# Altium PCB SolidStateTeslaCoil_PCB.PcbDoc
Units mm, origin at the board's own origin, x right, y up, seen from the top; angles counter-clockwise.
Board outline 100 x 100 mm, 4 copper layers (Top Layer, GND_1, GND_2, Bottom Layer), stack 1.57 mm thick; 89 components, 41 nets, 255 pads, 32 vias.
Unrouted connection lines stored in the file: 1.
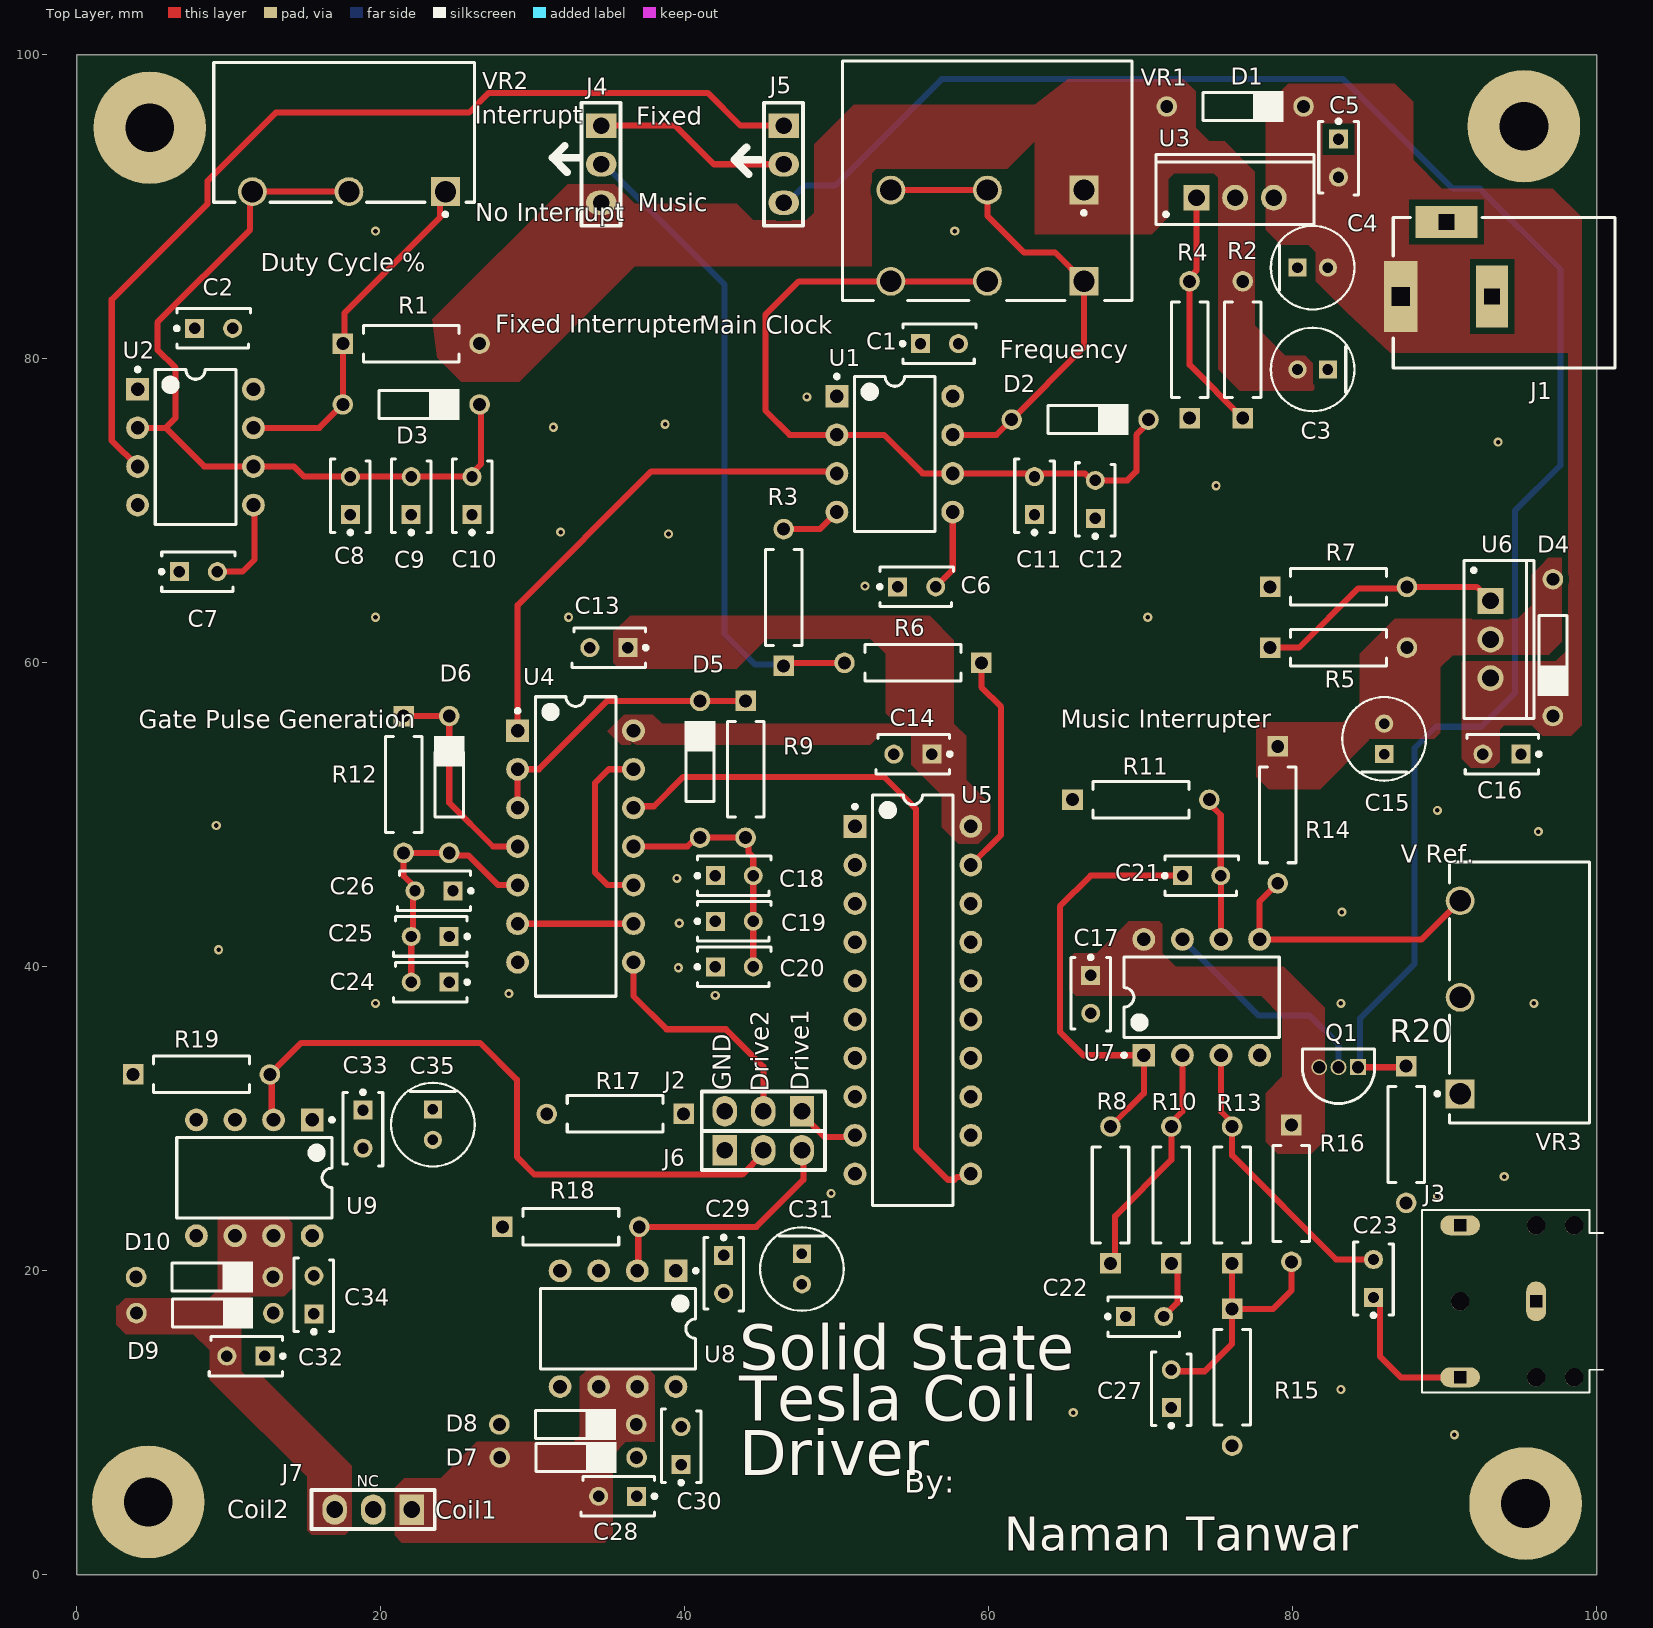
[diagram p0: Top Layer view]
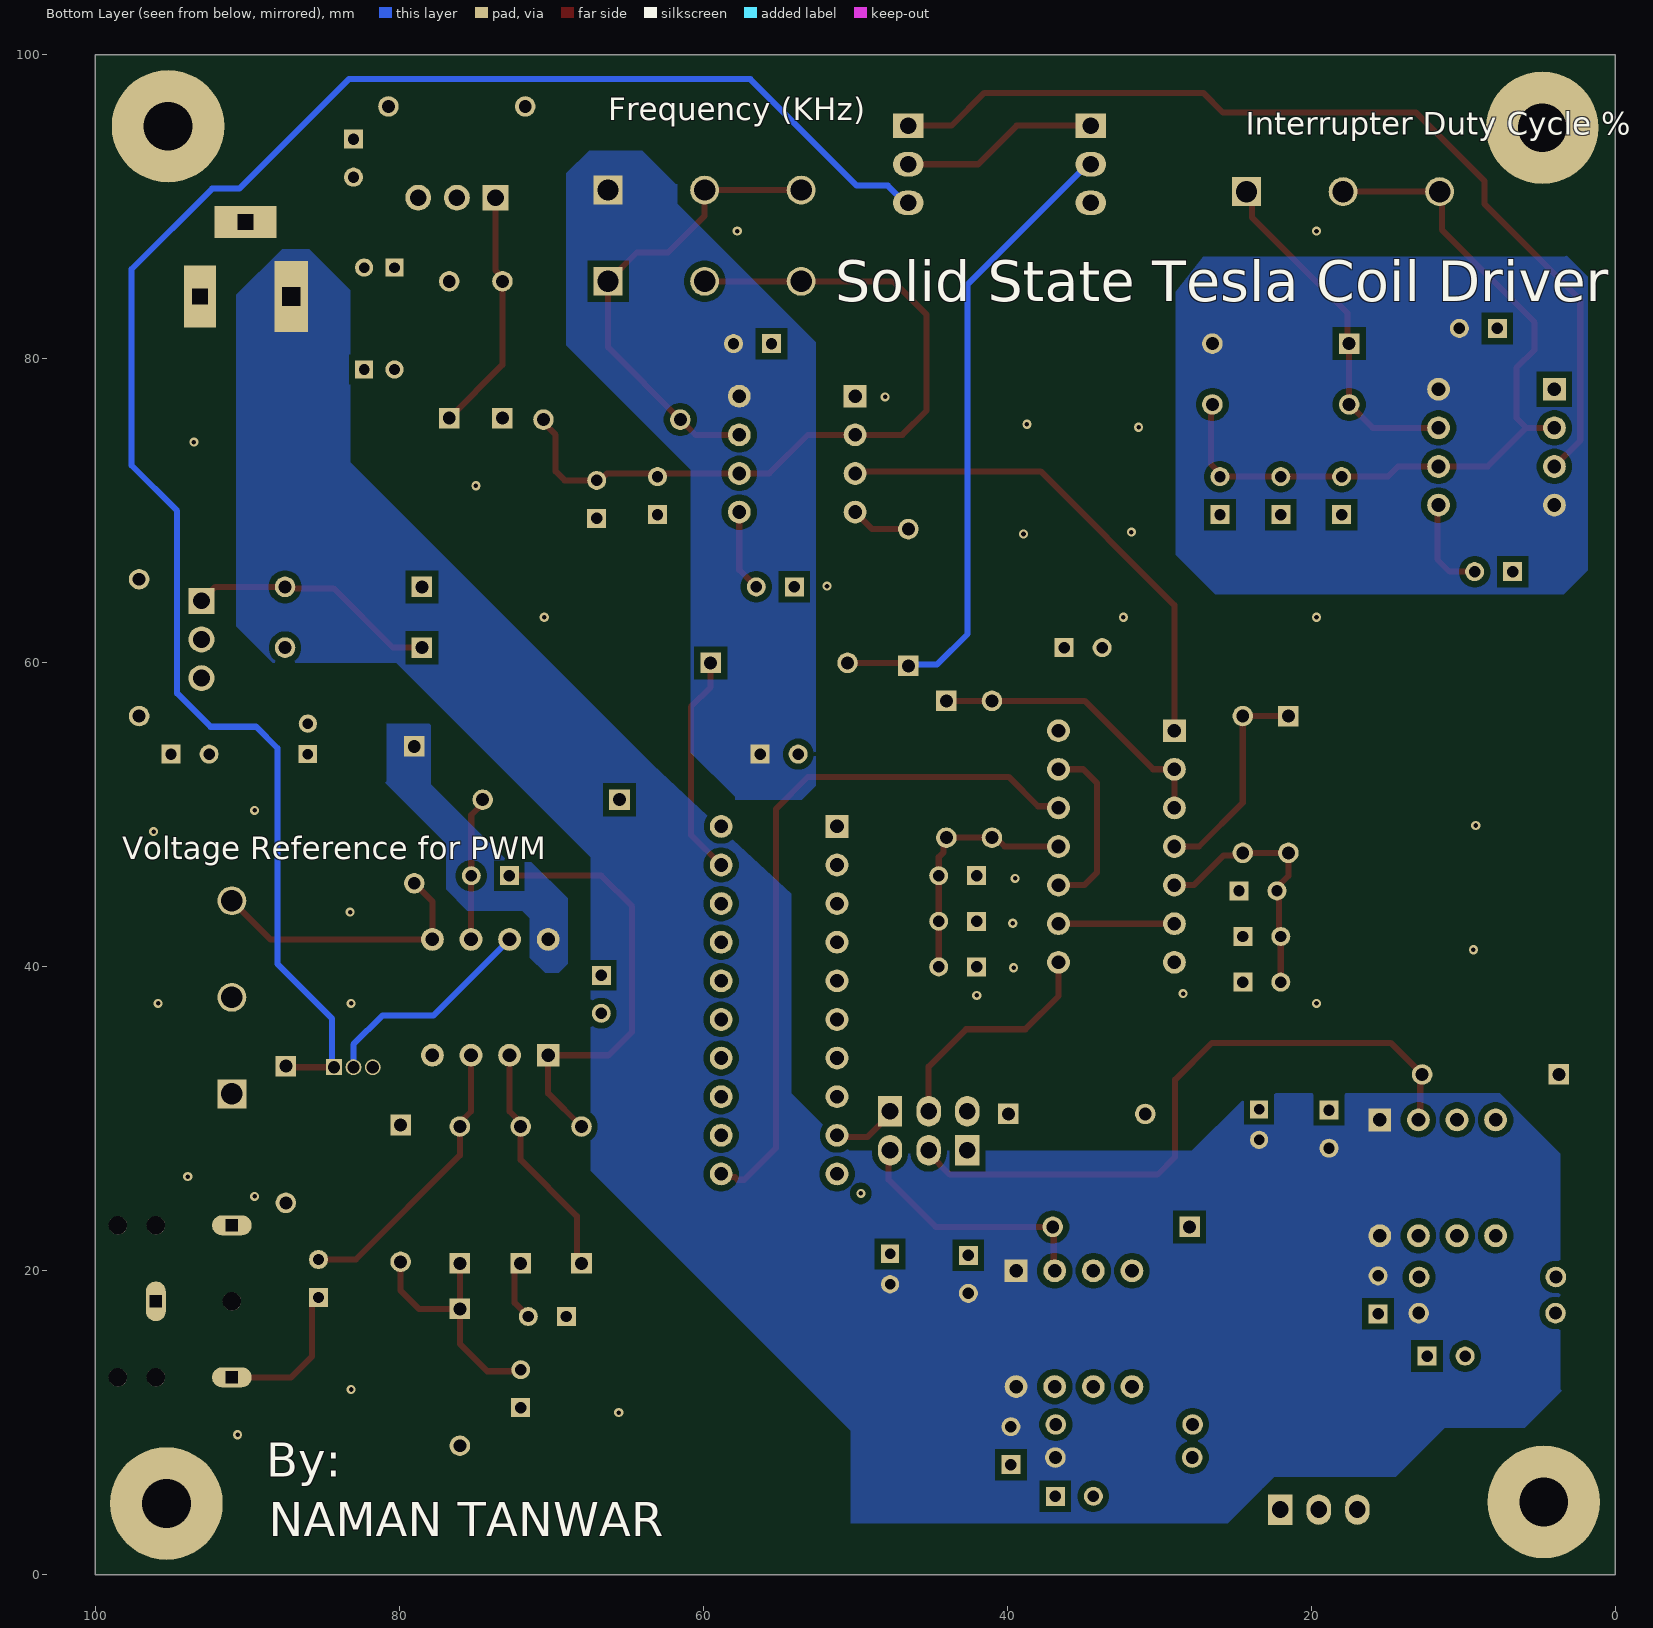
[diagram p1: Bottom Layer view, seen from below]
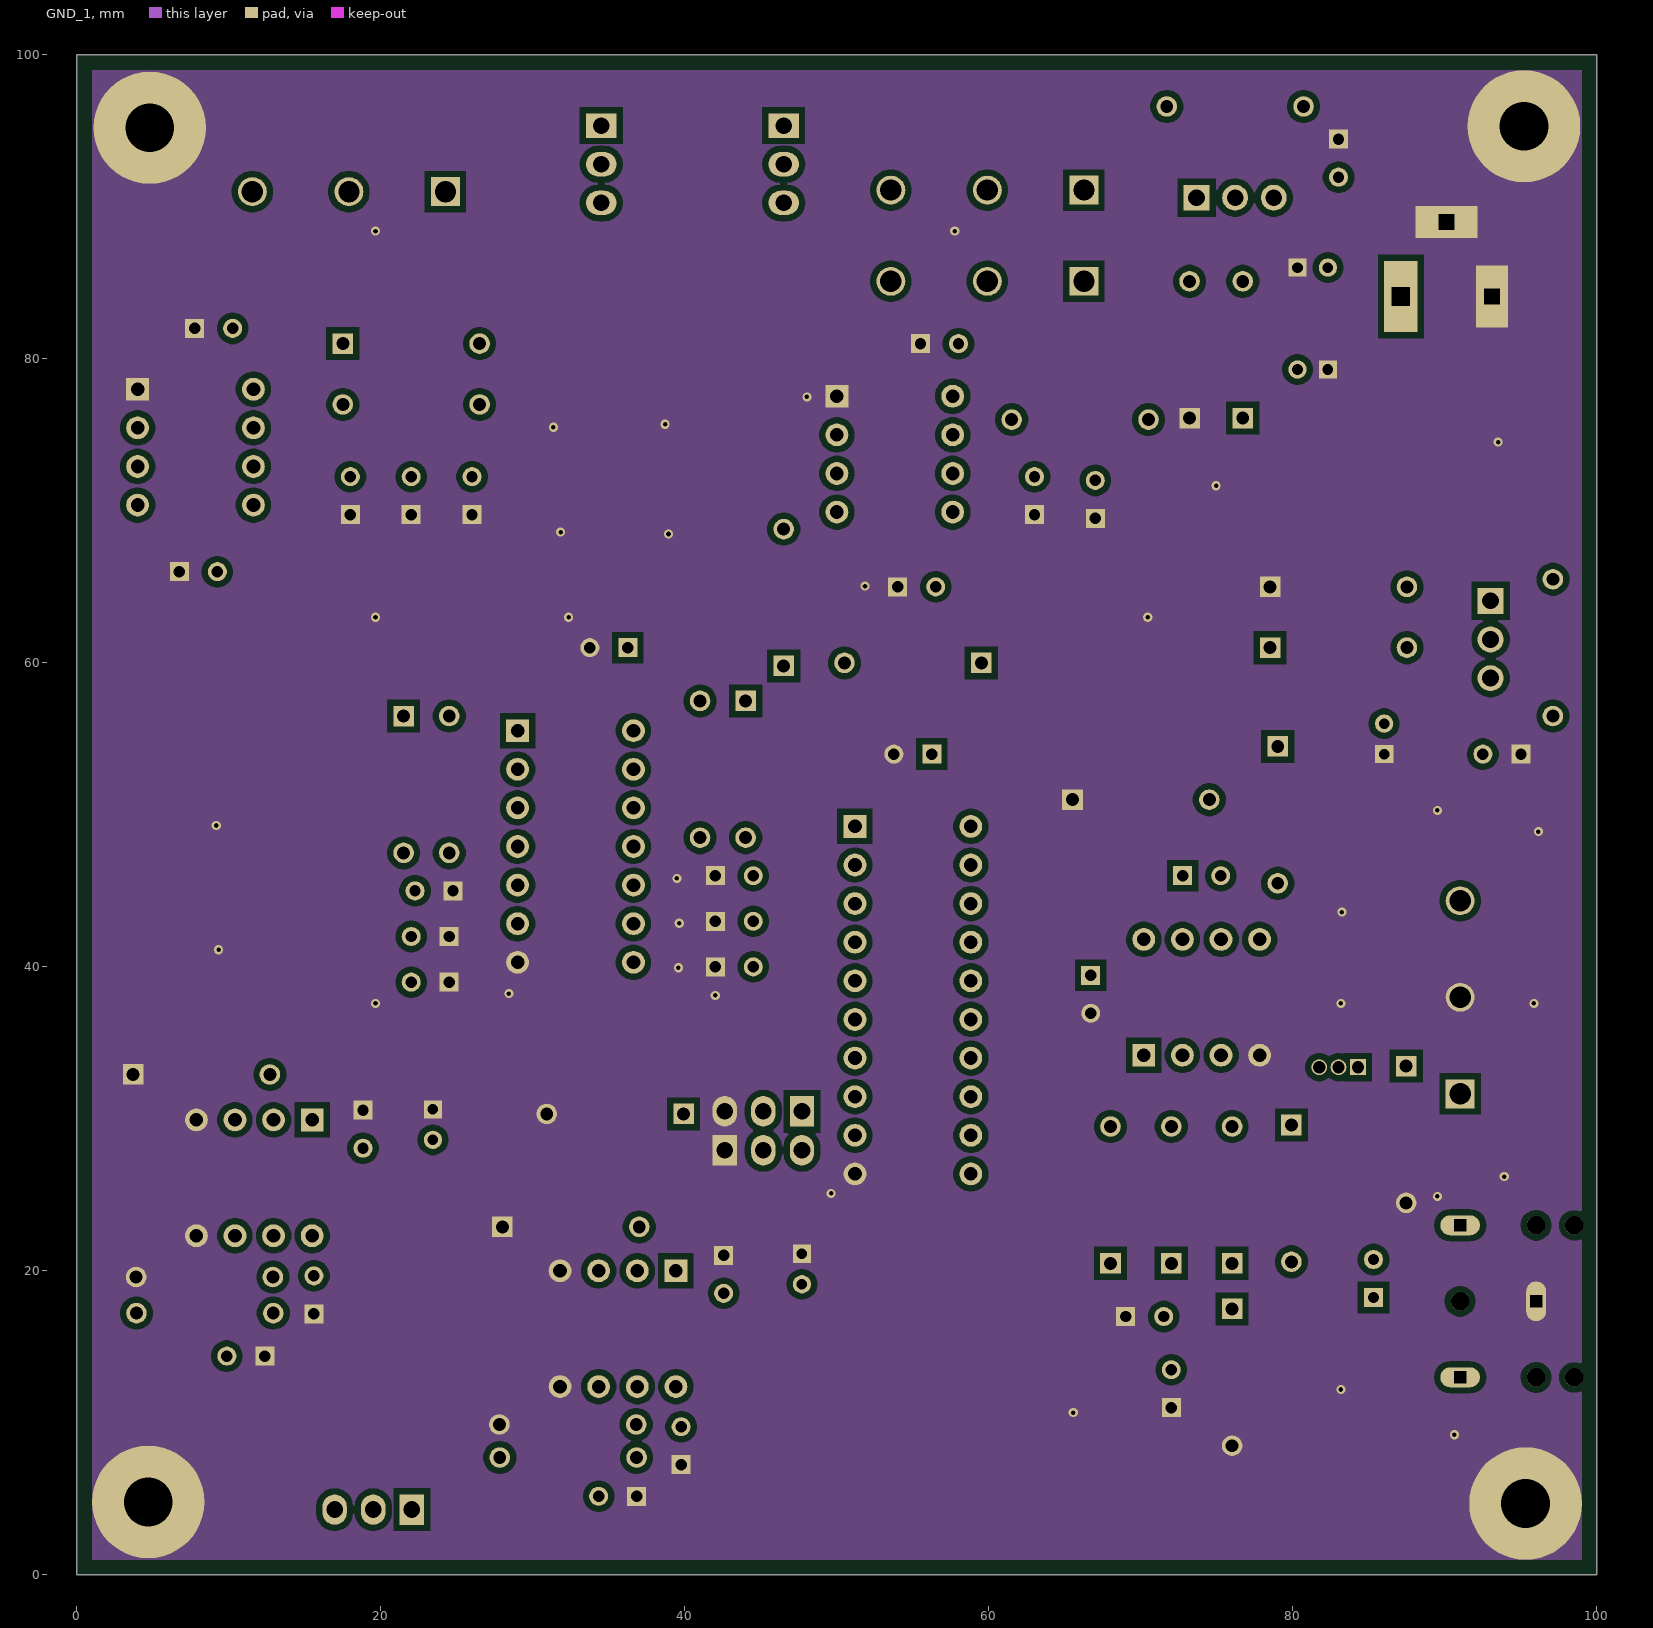
[diagram p2: GND_1]
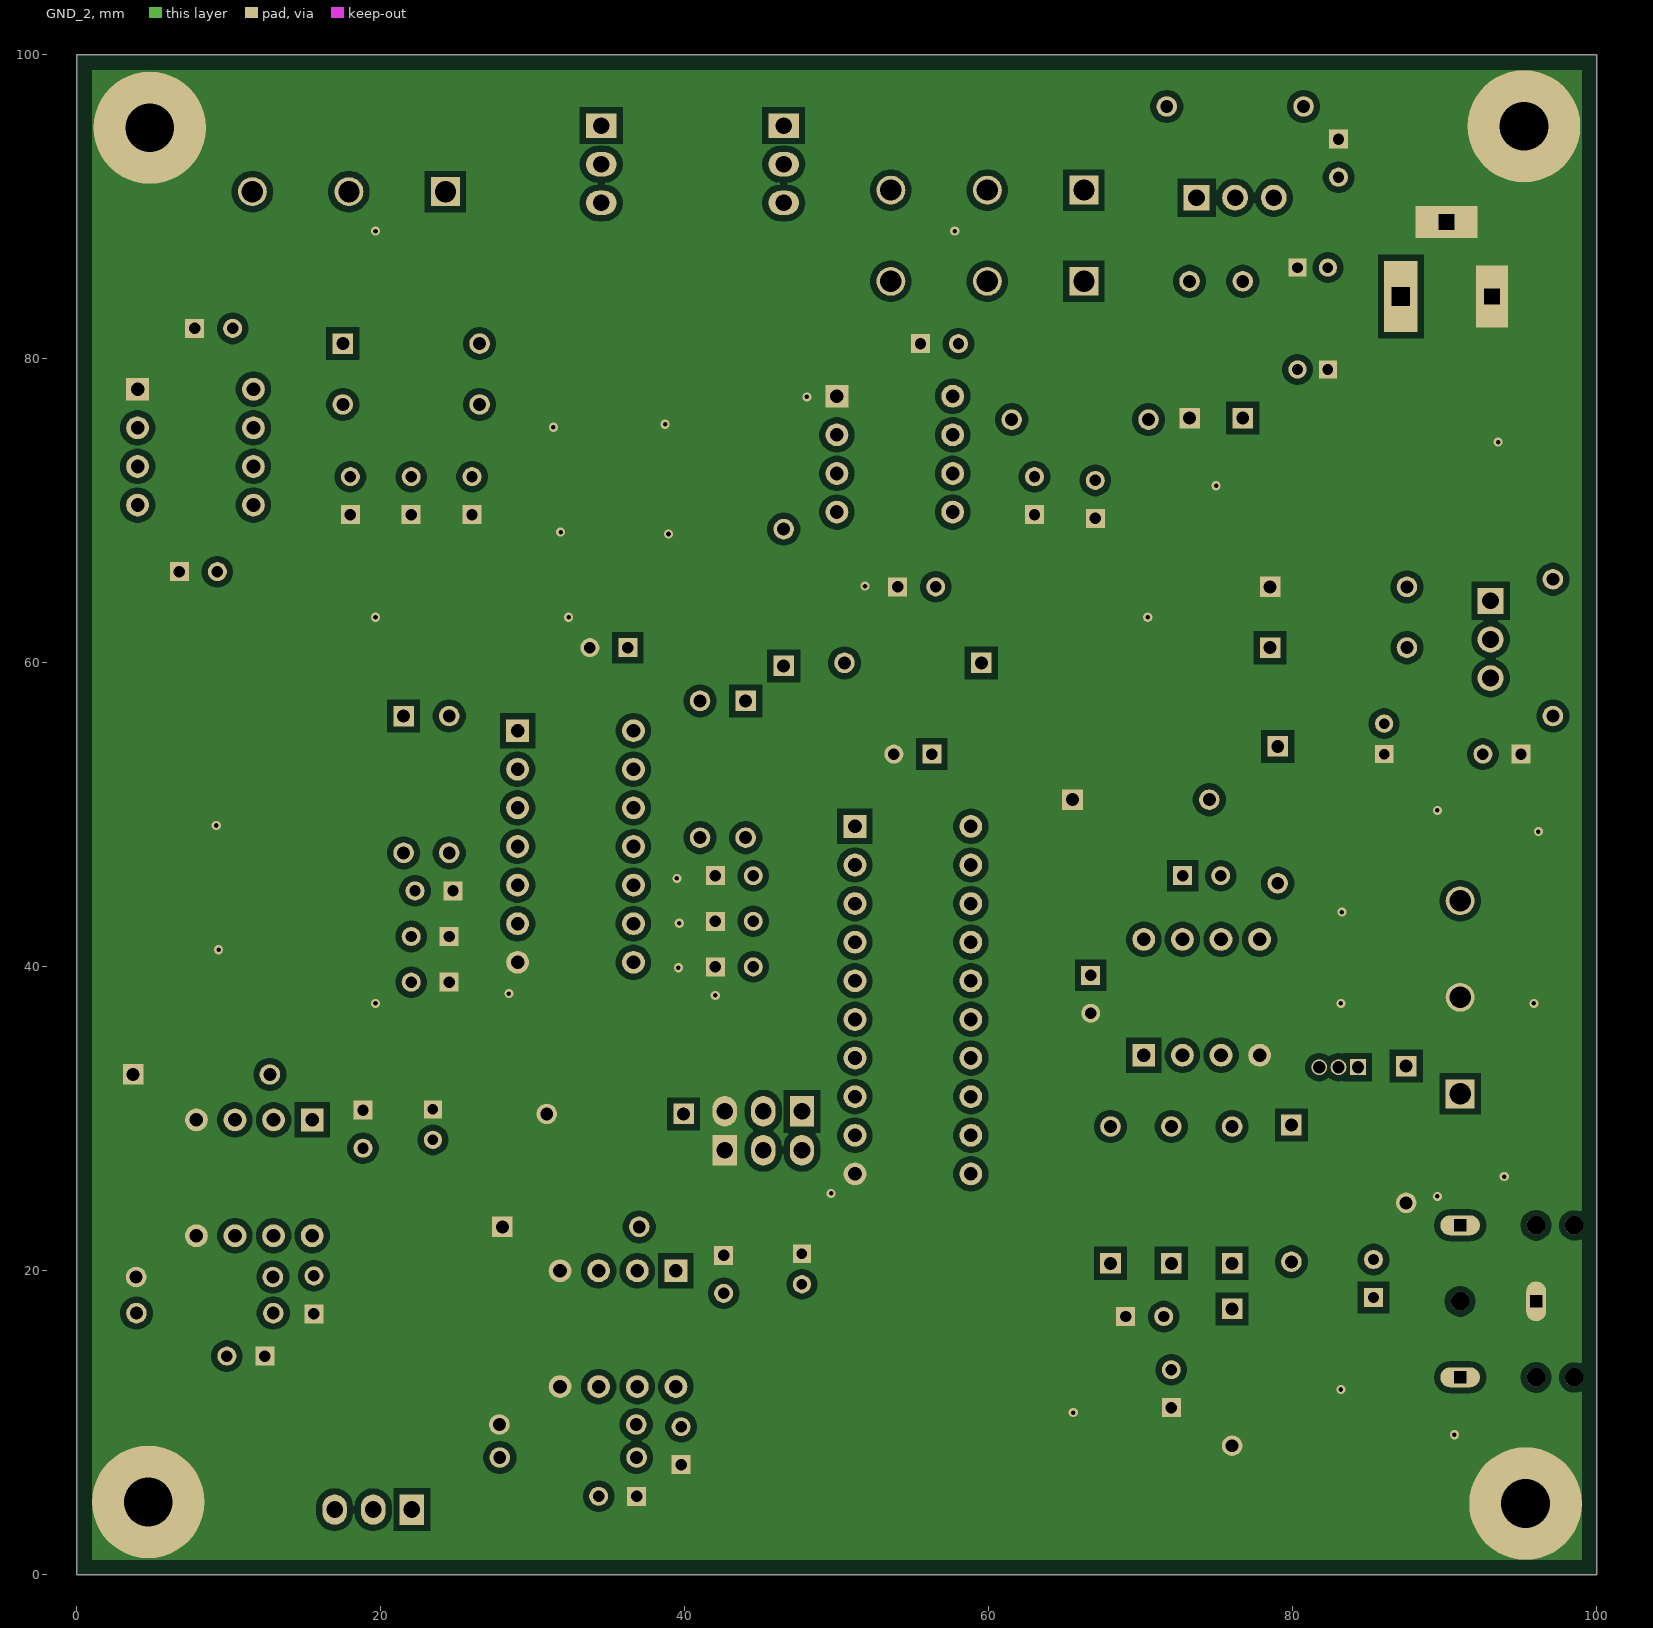
[diagram p3: GND_2]

## Layer stack, top to bottom
Top Solder: solder mask 0.0102, Solder Resist, Dk 3.5
Top Layer: signal copper 0.035
Dielectric 2: prepreg 0.2, PP-006, Dk 4.1
GND_1: signal copper 0.0175
Dielectric 1: dielectric 1.065, FR-4, Dk 4.8
GND_2: signal copper 0.0175
Dielectric 3: prepreg 0.2, PP-006, Dk 4.1
Bottom Layer: signal copper 0.035
Bottom Solder: solder mask 0.0102, Solder Resist, Dk 3.5

## Board outline
0,0 0,100 100,100 100,0

## Design rules (kind name [scope] priority, off if disabled: settings)
Clearance [All] p1: gap=0.4 ignorepadtopadclearanceinfootprint=FALSE
ComponentClearance [All] p1: gap=0.051 collisioncheckmode=3 verticalgap=0.051 showdistances=FALSE
PlaneClearance [All] p1: clearance=1
PlaneConnect [All] p1: planeconnectstyle=Direct reliefexpansion=0.508 reliefentries=4 reliefconductorwidth=0.254 reliefairgap=0.254
PolygonConnect PolygonConnectVia [All vs IsVia] p1: connectstyle=Direct reliefconductorwidth=0.254 reliefentries=4 polygonreliefangle="90 Angle" airgapwidth=0.254
PolygonConnect [All] p2: connectstyle=Direct reliefconductorwidth=0.254 reliefentries=4 polygonreliefangle="90 Angle" airgapwidth=0.254
RoutingVias [All] p1: holewidth=0.3 width=0.6 viastyle="Through Hole" minholewidth=0.2 minwidth=0.4 maxholewidth=0.711 maxwidth=1.27
SolderMaskExpansion [All] p1: expansion=0.102 istentingtop=FALSE
Width [All] p1: maxlimit=1 minlimit=0.254 preferedwidth=0.254
27 further rules are at their usual default settings.

## Classes and differential pairs
component class SolidStateTeslaCoil_GateCoilDriver_SCHEMATIC: C28 C29 C30 C31 C32 C33 C34 C35 D7 D8 D9 D10 J6 J7 R18 R19 U8 U9
component class SolidStateTeslaCoil_SCHEMATIC: C1 C2 C3 C4 C5 C6 C7 C8 C9 C10 C11 C12 C13 C14 C15 C16 C17 C18 C19 C20 C21 C22 C23 C24 C25 C26 C27 D1 D2 D3 D4 D5 D6 J1 J2 J3 J4 J5 Q1 R1 R2 R3 R4 R5 R6 R7 R8 R9 R10 R11 R12 R13 R14 R15 R16 R17 U1 U2 U3 U4 U5 U6 U7 VR1 VR2 VR3

## Components (designator, comment, footprint, x,y, rotation, side; value= is the part's Value field where it differs from the comment)
C1 "0.1u" "CERAMIC CAPACITOR THT" 56.75,81 r0 top
C2 "0.1u" "CERAMIC CAPACITOR THT" 9,82 r0 top
C3 "2u2" FP-RAD-TH-D_5_0_5-L_11_1-MFG 81.3,79.3 r180 top
C4 "10u" FP-RAD-TH-D_5_0_5-L_11_1-MFG 81.3,86 r0 top
C5 "0.1u" "CERAMIC CAPACITOR THT" 83,93.2 r270 top
C6 "0.01u" "CERAMIC CAPACITOR THT" 55.25,65 r0 top
C7 "0.01u" "CERAMIC CAPACITOR THT" 8,66 r0 top
C8 "0.1u" "CERAMIC CAPACITOR THT" 18,71 r90 top
C9 "0.1u" "CERAMIC CAPACITOR THT" 22,71 r90 top
C10 "0.1u" "CERAMIC CAPACITOR THT" 26,71 r90 top
C11 "0.0001u" "CERAMIC CAPACITOR THT" 63,71 r90 top
C12 "0.0001u" "CERAMIC CAPACITOR THT" 67,70.75 r90 top
C13 "0.1u" "CERAMIC CAPACITOR THT" 35,61 r180 top
C14 "0.1u" "CERAMIC CAPACITOR THT" 55,54 r180 top
C15 "2u2" FP-RAD-TH-D_5_0_5-L_11_1-MFG 86,55 r90 top
C16 "0.1u" "CERAMIC CAPACITOR THT" 93.75,54 r180 top
C17 "0.1u" "CERAMIC CAPACITOR THT" 66.7,38.2 r270 top
C18 "0.0001u" "CERAMIC CAPACITOR THT" 43.25,46 r0 top
C19 "0.0001u" "CERAMIC CAPACITOR THT" 43.25,43 r0 top
C20 "0.0001u" "CERAMIC CAPACITOR THT" 43.25,40 r0 top
C21 "0.1u" "CERAMIC CAPACITOR THT" 74,46 r0 top
C22 "0.1u" "CERAMIC CAPACITOR THT" 70.25,17 r0 top
C23 "0.1u" "CERAMIC CAPACITOR THT" 85.3,19.5 r90 top
C24 "0.0001u" "CERAMIC CAPACITOR THT" 23.25,39 r180 top
C25 "0.0001u" "CERAMIC CAPACITOR THT" 23.25,42 r180 top
C26 "0.0001u" "CERAMIC CAPACITOR THT" 23.5,45 r180 top
C27 "0.1u" "CERAMIC CAPACITOR THT" 72,12.25 r90 top
C28 "0.001u" "Ceramic Capacitor THT" 35.575,5.175 r180 top
C29 "0.1u" "Ceramic Capacitor THT" 42.55,19.775 r270 top
C30 "0.1u" "Ceramic Capacitor THT" 39.75,8.5 r90 top
C31 "4u7" FP-RAD-TH-D_5_0_5-L_11_1-MFG 47.7,20.125 r270 top
C32 "0.001u" "Ceramic Capacitor THT" 11.125,14.4 r180 top
C33 "0.1u" "Ceramic Capacitor THT" 18.825,29.325 r270 top
C34 "0.1u" "Ceramic Capacitor THT" 15.6,18.425 r90 top
C35 "4u7" FP-RAD-TH-D_5_0_5-L_11_1-MFG 23.425,29.625 r270 top
D1 "1N4007" DIODE 76.2,96.6 r0 top
D2 "1N4148" DIODE 66,76 r0 top
D3 "1N4148" DIODE 22,77 r0 top
D4 "1N4007" DIODE 97.1,61 r270 top
D5 "1N4148" DIODE 41,53 r90 top
D6 "1N4148" DIODE 24.5,52 r90 top
D7 "FR207" Diode 32.325,7.725 r0 top
D8 "FR207" Diode 32.3,9.9 r0 top
D9 "FR207" Diode 8.425,17.225 r0 top
D10 "FR207" Diode 8.4,19.6 r0 top
J1 "4840.2201" DC_JACK 87.1,84.1 r90 top
J2 "HDR 1X3" HDR_1X3_2.54MM 47.7,30.5 r270 top
J3 "AUX Conn" CUI_SJ1-3523NG 96,18 r180 top
J4 "HDR 1X3" HDR_1X3_2.54MM 34.5,95.34 r0 top
J5 "HDR 1X3" HDR_1X3_2.54MM 46.5,95.34 r0 top
J6 "HDR 1X3" HDR_1X3_2.54MM 42.621,27.94 r90 top
J7 "HDR 1X3" HDR_1X3_2.54MM 22.04,4.3 r270 top
MH1 "MH_7.4MMC_3.2MMD" MH_7.4MMC_3.2MMD 4.8,95.2 r0 top
MH2 "MH_7.4MMC_3.2MMD" MH_7.4MMC_3.2MMD 95.2,95.3 r0 top
MH3 "MH_7.4MMC_3.2MMD" MH_7.4MMC_3.2MMD 95.3,4.7 r0 top
MH4 "MH_7.4MMC_3.2MMD" MH_7.4MMC_3.2MMD 4.7,4.8 r0 top
Q1 "2N3904BU" FAIR-TO-92 84.27,33.4 r180 top
R1 "1k" RESA60-630X240 22,81 r0 top
R2 "220R" RESA60-630X240 76.7,80.6 r90 top
R3 "1k" RESA60-630X240 46.5,64.3 r90 top
R4 "680R" RESA60-630X240 73.2,80.6 r90 top
R5 "220R" RESA60-630X240 83,61 r0 top
R6 "1k" RESA60-630X240 55,60 r180 top
R7 "680R" RESA60-630X240 83,65 r0 top
R8 "220k" RESA60-630X240 68,25 r90 top
R9 "1k" RESA60-630X240 44,53 r270 top
R10 "100k" RESA60-630X240 72,25 r90 top
R11 "1M" RESA60-630X240 70,51 r0 top
R12 "1k" RESA60-630X240 21.5,52 r270 top
R13 "100k" RESA60-630X240 76,25 r90 top
R14 "10k" RESA60-630X240 79,50 r270 top
R15 "100k" RESA60-630X240 76,13 r270 top
R16 "100k" RESA60-630X240 79.9,25.1 r270 top
R17 "10k" RESA60-630X240 35.414,30.328 r180 top
R18 "10k" RESA60-630X240 32.5,22.9 r0 top
R19 "10k" RESA60-630X240 8.2,32.925 r0 top
R20 "10k" RESA60-630X240 87.45,28.975 r270 top
U1 "NE555P" 8PINDIP 53.81,73.73 r0 top
U2 "NE555P" 8PINDIP 7.81,74.19 r0 top
U3 "LM317T" TO-220 76.2,90.6 r0 top
U4 "SN74LS14N" 14PINDIP 32.81,47.92 r0 top
U5 "CD74HCT241E" 20PINDIP 55,37.813 r0 top
U6 "LM317T" TO-220 93,61.54 r270 top
U7 "LM358AP" 8PINDIP 74,38 r90 top
U8 "TC4420CPA" 8PINDIP 35.6,16.2 r270 top
U9 "TC4420CPA" 8PINDIP 11.675,26.125 r270 top
VR1 "5K Dual Gang POT" "DUAL GANG POT" 59.9,91.1 r180 top
VR2 "10K POT" BOUR-3852A-282-103AL-3_V 17.9,91 r180 top
VR3 "1K POT" BOUR-3852A-282-103AL-3_V 91,38 r90 top

## Footprints (in the part's own frame and the unit in brackets; to place one, negate y for a bottom-side part, rotate by r counter-clockwise, add the part's x,y. Pads: shape width x height; smd on the part's side, far side on the other; paste and mask are expansions set on the pad)
8PINDIP [mm] "DIP, 8-Leads, Body 10.15x6.6mm, Pitch 2.54mm"
  rect 1.5x1.5 hole 0.9: 1(-3.81,3.81)
  round 1.5 hole 0.9: 2(-3.81,1.27) 3(-3.81,-1.27) 4(-3.81,-3.81) 5(3.81,-3.81) 6(3.81,-1.27) 7(3.81,1.27) 8(3.81,3.81)
  silkscreen extent -3.93,-5.1 2.65,5.23, body extent -3.95,-5.07 3.95,5.07, height 5.08
14PINDIP [mm] "DIP, 14-Leads, Body 19.7x6.6mm, Pitch 2.54mm"
  rect 1.5x1.5 hole 0.9: 1(-3.81,7.62)
  round 1.5 hole 0.9: 2(-3.81,5.08) 3(-3.81,2.54) 4(-3.81,0) 5(-3.81,-2.54) 6(-3.81,-5.08) 7(-3.81,-7.62) 8(3.81,-7.62) 9(3.81,-5.08) 10(3.81,-2.54) 11(3.81,0) 12(3.81,2.54) 13(3.81,5.08) 14(3.81,7.62)
  silkscreen extent -3.93,-9.85 2.65,9.85, body extent -3.95,-9.85 3.95,9.85, height 5.08
20PINDIP [mm] "DIP, 20-Leads, Body 26.9x6.6mm, Pitch 2.54mm"
  rect 1.5x1.5 hole 0.9: 1(-3.81,11.43)
  round 1.5 hole 0.9: 2(-3.81,8.89) 3(-3.81,6.35) 4(-3.81,3.81) 5(-3.81,1.27) 6(-3.81,-1.27) 7(-3.81,-3.81) 8(-3.81,-6.35) 9(-3.81,-8.89) 10(-3.81,-11.43) 11(3.81,-11.43) 12(3.81,-8.89) 13(3.81,-6.35) 14(3.81,-3.81) 15(3.81,-1.27) 16(3.81,1.27) 17(3.81,3.81) 18(3.81,6.35) 19(3.81,8.89) 20(3.81,11.43)
  silkscreen extent -3.93,-13.5 2.65,13.5, body extent -3.95,-13.45 3.95,13.45, height 5.08
BOUR-3852A-282-103AL-3_V [mm] "TH, 3-Leads, Body 19.81x19.05mm, Pitch 6.35mm"
  rect 1.9x1.9 hole 1.4: 1(-6.35,0)
  round 1.9 hole 1.4: 2(0,0) 3(6.35,0)
  silkscreen extent -8.25,-8.5 8.89,1.62, body extent -9.52,-19.11 9.53,0.7, height 19.05
"CERAMIC CAPACITOR THT" [mm] "THD, 2-Leads, Body 4x2.6mm"
  rect 1.25x1.25 hole 0.75: 1(-1.25,0)
  round 1.25 hole 0.75: 2(1.25,0)
  silkscreen extent -2.55,-1.3 2.41,1.3, body extent -2.35,-1.25 2.35,1.25, height 7.35
"Ceramic Capacitor THT" [mm] "THD, 2-Leads, Body 4x2.6mm"
  rect 1.25x1.25 hole 0.75: 1(-1.25,0)
  round 1.25 hole 0.75: 2(1.25,0)
  silkscreen extent -2.55,-1.3 2.41,1.3, body extent -2.35,-1.25 2.35,1.25, height 7.35
CUI_SJ1-3523NG [mm]
  oval 1.308x2.616 hole 0.8 square: 1(0,0)
  oval 2.616x1.308 hole 0.8 square: 2(5,-5) 3(5,5)
  round 1.2 hole 1.2 unplated: ""(-2.5,5) ""(-2.5,-5) ""(0,5) ""(0,-5) ""(5,0)
  silkscreen extent -4.4,-6 7.5,6, body extent -6.43,-6.13 7.62,5.87, height 6
DC_JACK [mm]
  rect 4.7x2.2 hole 1.2 square: 1(0,0)
  rect 4.1x2.1 hole 1 square: 2(0,-6)
  rect 2.1x4.1 hole 1 square: 3(4.9,-3)
  silkscreen extent -4.7,-14.1 5.2,0.5, body extent -4.67,-14.21 5.1,0.41, height 10.67
DIODE [mm] "SOD27, 2-Leads, Dia 1.85mm, Body Length 4.25mm, Pin Spacing 9mm"
  round 1.35 hole 0.85: 1(-4.5,0) 2(4.5,0)
  silkscreen extent -2.12,-1.02 3.18,1.02, body extent -4.78,-0.93 4.78,0.92, height 1.85
Diode [mm] "SOD27, 2-Leads, Dia 1.85mm, Body Length 4.25mm, Pin Spacing 9mm"
  round 1.35 hole 0.85: 1(-4.5,0) 2(4.5,0)
  silkscreen extent -2.12,-1.02 3.18,1.02, body extent -4.78,-0.93 4.78,0.92, height 1.85
"DUAL GANG POT" [mm] "TH, 3-Leads, Body 19.81x19.05mm, Pitch 6.35mm"
  rect 1.9x1.9 hole 1.4: 1(-6.35,0) 4(-6.35,6)
  round 1.9 hole 1.4: 2(0,0) 3(6.35,0) 5(0,6) 6(6.35,6)
  silkscreen extent -9.53,-8.5 9.53,7.25, body extent -9.53,-19.11 9.53,7.24, height 19.05
FAIR-TO-92 [mm] "TO, 3-Leads, Body Dia 4.79mm, Pitch 1.27mm"
  rect 1.05x1.05 hole 0.8 mask+0.05: 1(0,0)
  round 1.05 hole 0.8 mask+0.05: 2(1.27,0) 3(2.54,0)
  silkscreen extent -1.11,-1.21 3.65,2.4, body extent -1.11,-1.21 3.65,2.4, height 5.33
FP-RAD-TH-D_5_0_5-L_11_1-MFG [mm]
  rect 1.2x1.2 hole 0.7 paste-1000 mask+0: 1(-1,0)
  round 1.2 hole 0.7 paste-1000 mask+0: 2(1,0)
  silkscreen extent -2.75,-2.75 2.75,2.75, body extent -2.85,-2.85 2.85,2.85, height 0.25
HDR_1X3_2.54MM [mm]
  rect 2x1.6 hole 1.1: 1(0,0)
  oval 2x1.6 hole 1.1: 2(0,-2.54) 3(0,-5.08)
  silkscreen extent -1.3,-6.59 1.28,1.51, body extent -1.21,-6.34 1.2,1.28, height 8.19
MH_7.4MMC_3.2MMD [mm]
  round 7.4 hole 3.2: 1(0,0)
RESA60-630X240 [mm] "Axial Resistor, 2-Leads, Dia 2.4mm, Body Length 6.3mm"
  rect 1.35x1.35 hole 0.85: 1(-4.5,0)
  round 1.35 hole 0.85: 2(4.5,0)
  silkscreen extent -3.15,-1.2 3.15,1.2, body extent -4.78,-1.2 4.78,1.2, height 2.4
TO-220 [mm] "TO, Thru-Hole, Vertical, Heatsink Mounted; 3 In-Line Leads; Pitch 2.54 mm"
  rect 1.7x1.7 hole 1.1: 1(-2.54,0)
  round 1.7 hole 1.1: 2(0,0) 3(2.54,0)
  silkscreen extent -5.2,-1.75 5.2,2.85, body extent -5.25,-1.8 5.25,2.9, height 19.7

## Part data
C1 C2 C5 C8 C9 C10 C13 C14 C16 C17 C21 C22 C23 C27 C29 C30 C33 C34: library part "0.1u 104 Ceramic Capacitor", "Ceramic Capacitor, 100 nF, +/- 10%, 50 V, -55 to 125 degC, 2-Pin THD, RoHS, Tape and Reel", Capacitance=0.1µF, Manufacturer=Vishay, Operating Temperature=-55°C~125°C, Package / Case=Radial, Package Description="2-Pin Through Hole Device, Body 4 x 2.6 mm", Package Reference=K104K15X7RF5TL2, Ratings=-, Standard Package=1, Temperature Coefficient=X7R, Tolerance=±10%, Voltage - Rated=50V, Applications=GeneralPurpose, Catalog Drawings=Mono-KapSide2-15_5.58Mono-KapSide1_15, Category=Capacitors, Datasheet URL=http://www.vishay.com/docs/45171/kseries.pdf, Datasheet Version=08/2013, Family=CeramicCapacitors, Features=-, Height - Seated (Max)="0.220\"(5.58mm)", Lead Spacing="0.098\"(2.50mm)", Lead Style=Straight, Manufacturer URL=http://www.vishay.com/, Mounting Technology=ThroughHole, Mounting Type=ThroughHole, Online Catalog=Mono-Kap™Series, Other Names=BC1084CT, Packaging=CutTape(CT), Series=Mono-Kap™K, Size / Dimension="0.157\"Lx0.098\"W(4.00mmx2.50mm)", Thickness (Max)=-
C3 C15: library part "2u2 Electrolytic Capacitor", "Aluminum Electrolytic Capacitors (Radial Lead Type) AEC-Q200 Qualified 2.2uF ±20% 50V", Capacitance=2.2uF, Case/Package=Radial, ESR (Equivalent Series Resistance)=1.8R, Max Operating Temperature=105°C, Min Operating Temperature=-55°C, Package Quantity=2000, Ripple Current=45mA, Tolerance=20%, Voltage Rating=50V, Construction=RADIAL, Diameter=5mm, Features="General Purpose", Height=11mm, Height - Seated (Max)=0.472inch, Impedance=1.8R, Lead Diameter=0.5mm, Lead Pitch=5mm, Length=11mm, Life (Hours)=1000Hour, Mount="Through Hole", Packaging="Tape and Reel", Polarity=Polar, Radiation Hardening=No, RoHS Compliant=Yes, Series=FC, Termination=Radial, Voltage Rating (DC)=50V
C4: library part "10u Electrolytic Capacitor_1", "Aluminum Electrolytic Capacitors 10u", Capacitance=2.2uF, Case/Package=Radial, ESR (Equivalent Series Resistance)=1.8R, Max Operating Temperature=105°C, Min Operating Temperature=-55°C, Package Quantity=2000, Ripple Current=45mA, Tolerance=20%, Voltage Rating=50V, Construction=RADIAL, Diameter=5mm, Features="General Purpose", Height=11mm, Height - Seated (Max)=0.472inch, Impedance=1.8R, Lead Diameter=0.5mm, Lead Pitch=5mm, Length=11mm, Life (Hours)=1000Hour, Mount="Through Hole", Packaging="Tape and Reel", Polarity=Polar, Radiation Hardening=No, RoHS Compliant=Yes, Series=FC, Termination=Radial, Voltage Rating (DC)=50V
C6 C7: library part "0.01u 103 Ceramic Capacitor", "Ceramic Capacitor, 10 nF, +/- 10%, 50 V, -55 to 125 degC, 2-Pin THD, RoHS, Tape and Reel", Capacitance=0.1µF, Manufacturer=Vishay, Operating Temperature=-55°C~125°C, Package / Case=Radial, Package Description="2-Pin Through Hole Device, Body 4 x 2.6 mm", Package Reference=K104K15X7RF5TL2, Ratings=-, Standard Package=1, Temperature Coefficient=X7R, Tolerance=±10%, Voltage - Rated=50V, Applications=GeneralPurpose, Catalog Drawings=Mono-KapSide2-15_5.58Mono-KapSide1_15, Category=Capacitors, Datasheet URL=http://www.vishay.com/docs/45171/kseries.pdf, Datasheet Version=08/2013, Family=CeramicCapacitors, Features=-, Height - Seated (Max)="0.220\"(5.58mm)", Lead Spacing="0.098\"(2.50mm)", Lead Style=Straight, Manufacturer URL=http://www.vishay.com/, Mounting Technology=ThroughHole, Mounting Type=ThroughHole, Online Catalog=Mono-Kap™Series, Other Names=BC1084CT, Packaging=CutTape(CT), Series=Mono-Kap™K, Size / Dimension="0.157\"Lx0.098\"W(4.00mmx2.50mm)", Thickness (Max)=-
C11 C12 C18 C19 C20 C24 C25 C26: library part "0.0001u 101 Ceramic Capacitor", "Ceramic Capacitor, 0.1 nF, +/- 10%, 50 V, -55 to 125 degC, 2-Pin THD, RoHS, Tape and Reel", Capacitance=0.1µF, Manufacturer=Vishay, Operating Temperature=-55°C~125°C, Package / Case=Radial, Package Description="2-Pin Through Hole Device, Body 4 x 2.6 mm", Package Reference=K104K15X7RF5TL2, Ratings=-, Standard Package=1, Temperature Coefficient=X7R, Tolerance=±10%, Voltage - Rated=50V, Applications=GeneralPurpose, Catalog Drawings=Mono-KapSide2-15_5.58Mono-KapSide1_15, Category=Capacitors, Datasheet URL=http://www.vishay.com/docs/45171/kseries.pdf, Datasheet Version=08/2013, Family=CeramicCapacitors, Features=-, Height - Seated (Max)="0.220\"(5.58mm)", Lead Spacing="0.098\"(2.50mm)", Lead Style=Straight, Manufacturer URL=http://www.vishay.com/, Mounting Technology=ThroughHole, Mounting Type=ThroughHole, Online Catalog=Mono-Kap™Series, Other Names=BC1084CT, Packaging=CutTape(CT), Series=Mono-Kap™K, Size / Dimension="0.157\"Lx0.098\"W(4.00mmx2.50mm)", Thickness (Max)=-
C28 C32: library part "0.001u 102 Ceramic Capacitor", "Ceramic Capacitor, 1 nF, +/- 10%, 50 V, -55 to 125 degC, 2-Pin THD, RoHS, Tape and Reel", Capacitance=0.1µF, Manufacturer=Vishay, Operating Temperature=-55°C~125°C, Package / Case=Radial, Package Description="2-Pin Through Hole Device, Body 4 x 2.6 mm", Package Reference=K104K15X7RF5TL2, Ratings=-, Standard Package=1, Temperature Coefficient=X7R, Tolerance=±10%, Voltage - Rated=50V, Applications=GeneralPurpose, Catalog Drawings=Mono-KapSide2-15_5.58Mono-KapSide1_15, Category=Capacitors, Datasheet URL=http://www.vishay.com/docs/45171/kseries.pdf, Datasheet Version=08/2013, Family=CeramicCapacitors, Features=-, Height - Seated (Max)="0.220\"(5.58mm)", Lead Spacing="0.098\"(2.50mm)", Lead Style=Straight, Manufacturer URL=http://www.vishay.com/, Mounting Technology=ThroughHole, Mounting Type=ThroughHole, Online Catalog=Mono-Kap™Series, Other Names=BC1084CT, Packaging=CutTape(CT), Series=Mono-Kap™K, Size / Dimension="0.157\"Lx0.098\"W(4.00mmx2.50mm)", Thickness (Max)=-
C31 C35: library part "4u7 Electrolytic Capacitor", "Aluminum Electrolytic Capacitors (Radial Lead Type) AEC-Q200 Qualified 4u7uF ±20% 50V", Capacitance=2.2uF, Case/Package=Radial, ESR (Equivalent Series Resistance)=1.8R, Max Operating Temperature=105°C, Min Operating Temperature=-55°C, Package Quantity=2000, Ripple Current=45mA, Tolerance=20%, Voltage Rating=50V, Construction=RADIAL, Diameter=5mm, Features="General Purpose", Height=11mm, Height - Seated (Max)=0.472inch, Impedance=1.8R, Lead Diameter=0.5mm, Lead Pitch=5mm, Length=11mm, Life (Hours)=1000Hour, Mount="Through Hole", Packaging="Tape and Reel", Polarity=Polar, Radiation Hardening=No, RoHS Compliant=Yes, Series=FC, Termination=Radial, Voltage Rating (DC)=50V
D1 D4: "1N4007 Generic Diode", Case/Package=DO, Forward Current=300mA, Forward Voltage=1V, Manufacturer=Fairchild, Max Operating Temperature=175°C, Max Surge Current=4A, Min Operating Temperature=-65°C, Package Quantity=2000, Package Reference=SOD27, Peak Reverse Current=5uA, Power=500mW, Datasheet URL=http://www.nxp.com/documents/data_sheet/1N4148_1N4448.pdf, Datasheet Version=Aug-04, Diameter=1.91mm, Elements=1, Manufacturer URL=https://www.fairchildsemi.com/, Package URL=http://www.nxp.com/documents/data_sheet/1N4148_1N4448.pdf, Packaging=Bulk, Pins=2, Recovery Time=4ns, RoHS Compliant=True
D2 D3 D5 D6: "High Speed Diode, 100 V, 0.45 A, -65 to 175 degC, 2-Pin SOD27, RoHS, Bulk", Case/Package=DO, Forward Current=300mA, Forward Voltage=1V, Manufacturer=Fairchild, Max Operating Temperature=175°C, Max Surge Current=4A, Min Operating Temperature=-65°C, Package Quantity=2000, Package Reference=SOD27, Peak Reverse Current=5uA, Power=500mW, Datasheet URL=http://www.nxp.com/documents/data_sheet/1N4148_1N4448.pdf, Datasheet Version=Aug-04, Diameter=1.91mm, Elements=1, Manufacturer URL=https://www.fairchildsemi.com/, Package URL=http://www.nxp.com/documents/data_sheet/1N4148_1N4448.pdf, Packaging=Bulk, Pins=2, Recovery Time=4ns, RoHS Compliant=True
D7 D8 D9 D10: "MULTICOMP         FR207            Standard Power Diode fast diode, Single, 1 kV, 2 A, 1.2 V, 60 A, 150 C", Manufacturer=Multicomp, Supplier Part Number 1=01P3472, Category=Uncategorized, ComponentLink1Description=http://www.farnell.com/datasheets/1693119.pdf?src-supplier=Element14, ComponentLink1URL=http://www.farnell.com/datasheets/1693119.pdf?src-supplier=Element14, Manufacturer Part Number=FR207, Pricing 1="5=0.23, 10=0.19, 100=0.075, 1000=0.053 (USD)", RoHS=Yes, Supplier 1=Newark
J1: library part "DC JACK", "DC Connector Socket 6x2mm 2-Pole 12VDC 0.5A 500VDC Dielectric Solder Term PCB Mt", Color=Black, Current Rating=500mA, Manufacturer=Schurter, Package Quantity=500, Supplier Part Number 1=486-3381-ND, Voltage Rating=12V, Category=Connectors, ComponentLink1Description=https://datasheet.ciiva.com/26837/getdatasheetpartid-572408-26837414.pdf?src-supplier=Verical, ComponentLink1URL=https://datasheet.ciiva.com/26837/getdatasheetpartid-572408-26837414.pdf?src-supplier=Verical, ComponentLink2Description=https://datasheet.ciiva.com/16318/typ-4840-1200-16318967.pdf?src-supplier=Future+Electronics, ComponentLink2URL=https://datasheet.ciiva.com/16318/typ-4840-1200-16318967.pdf?src-supplier=Future+Electronics, ComponentLink3Description=https://datasheet.ciiva.com/12342/typ-4840-2201-65401-12342879.pdf?src-supplier=Mouser, ComponentLink3URL=https://datasheet.ciiva.com/12342/typ-4840-2201-65401-12342879.pdf?src-supplier=Mouser, ComponentLink4Description=https://datasheet.ciiva.com/391/typ-4840-2201-391834.pdf?src-supplier=Digi-Key, ComponentLink4URL=https://datasheet.ciiva.com/391/typ-4840-2201-391834.pdf?src-supplier=Digi-Key, Connector Type=Jack, Contact Material="Copper Alloy", Contact Plating=Tin, Depth=14.5mm, Gender=Male, Housing Color=Black, Housing Material=PC, Lead Free="Lead Free", Length=9mm, Manufacturer Part Number=4840.2201, Mounting Technology="Through Hole", Number of Contacts=3, Number of Ports=1, Number of Terminals/Pins=3, Orientation="Right Angle", Pin Diameter=2mm, Pricing 1="1=1.82000, 50=1.67900, 100=1.41120 (USD)", Radiation Hardening=No, RoHS=Yes, RoHS Compliant=Yes, Series=4840, Shielding=Unshielded, Stock 1=9153, Supplier 1=Digi-Key, Termination=Solder, Weight=0.007125oz, Width=9mm
J2 J4 J5 J6 J7: library part 68000-103HLF, "Conn Unshrouded Header HDR 3 POS 2.54mm Solder ST Top Entry Thru-Hole BergStik® Automotive Bulk", Manufacturer="Amphenol ICC / FCI", Supplier Part Number 1=609-3461-ND, Category="Headers and Wire Housings", ComponentLink1Description=https://datasheet.ciiva.com/46392/1914865-46392021.pdf?src-supplier=Element14, ComponentLink1URL=https://datasheet.ciiva.com/46392/1914865-46392021.pdf?src-supplier=Element14, Manufacturer Part Number=68000-103HLF, RoHS=No, Supplier 1=Digi-Key
J3: library part SJ1-3523NG, "3.5 mm Right-Angle Stereo Jack, 3 Pin PCB Mount, Isolated Ground", Case/Package=None, Availability=Unavailable, Component Type=Standard, Design Item ID=SJ1-3523NG, MP=SJ1-3523NG, Pins=3, Price=None, Source=SJ1-3523NG.SchLib
MH1 MH2 MH3 MH4: "Mounting Hole 7.4mm Diameter, 3.2mm Drill"
Q1: library part 2N3904, "NPN General-Purpose Amplifier, 40 V VCEO, 0.2 A, -55 to 150 degC, 2-Pin TO-92, RoHS, Bulk", Manufacturer=FairchildSemiconductor, Maximum Collector Base Voltage=60V, Maximum Collector Emitter Saturation Voltage=0.2@1mA@10mA|0.3@5mA@50mAV, Maximum Collector Emitter Voltage=40V, Maximum DC Collector Current=0.2A, Maximum Operating Frequency=300(Min)MHz, Maximum Power Dissipation=625mW, Minimum DC Current Gain=40@0.1mA@1V|70@1mA@1V|100@10mA@1V|60@50mA@1V|30@100mA@1V, Operating Temperature=-55to150degC, Package=3TO-92, Package Description="3-Pin Transistor Outline Package, Body Dia 4.79 mm, Pitch 1.27 mm", Package Reference=TO-92, Category=GPBJT, Datasheet URL=https://datasheet.ciiva.com/4722/2n3904-82270-4722369.pdf, Datasheet Version="Rev. 1.1.0, 10/2014", Manufacturer URL=https://www.fairchildsemi.com/, Mounting=ThroughHole, Packaging=Bulk, Pin Count=3, Rad Hard=No, Type=NPN
R1 R3 R6 R9 R12: library part "1k MFR-25FBF52-1K", "Axial Resistor, 1 KOhm, +/- 1%, 250 mW, -55 to 155 degC, 2-Pin THD, RoHS, Bulk"
R2 R5: "Axial Resistor, 220 Ohm,"
R4 R7: "Axial Resistor, 680 Ohm,"
R8: library part "220k Axial Resistor", "Axial Resistor, 220 KOhm,"
R10 R13 R15 R16: library part "100k Axial Resistor", "Axial Resistor, 100 KOhm"
R11: library part "1M Axial Resistor", "Axial Resistor, 1 MOhm,"
R14 R17 R18 R19 R20: "Axial Resistor, 10 KOhm, +/- 1%, 250 mW, -55 to 155 degC, 2-Pin THD, RoHS, Bulk"
U1 U2: library part NE555, "Precision Timer, 4.5 to 16 V, 0 to 70 degC, 8-Pin DIP, Pb-Free, Tube", Manufacturer=TexasInstruments, Maximum High Level Output Current=-200mA, Maximum Low Level Output Current=200mA, Operating Supply Voltage=5|9|12|15V, Package=8PDIP, Package Description="8-Pin Double In-line Package, Body 9.59 x 6.35 mm, Pitch 2.54 mm", Package Reference=P8, Category=Timer, Datasheet URL=http://www.ti.com/general/docs/lit/getliterature.tsp?genericPartNumber=NE555&fileType=pdf, Datasheet Version="Rev. I, 09/2014", Manufacturer URL=http://www.ti.com/, Number of Internal Timers=1, Package URL=http://www.ti.com/lit/ml/mpdi001b/mpdi001b.pdf, Packaging=Rail/Tube, Rad Hard=No, Type=Standard
U3 U6: library part LM317, "Integrated Circuit 3-terminal Positive Adjustable Voltage Regulator TO-220 Case 1.2 To 37 Volts", Case/Package=TO-220, Pins=3, RoHS Compliant=Yes
U4: library part 74LS14, "Hex schmitt-trigger inverters, N0014A, TUBE", F @ Nom Voltage(Max)(Mhz)=35, Generic Part Number=SN74LS14, ICC @ Nom Voltage(Max)(mA)=0.06, Manufacturer="Texas Instruments", Operating Temperature Range(C)="0 to 70", Rating=Catalog, tpd @ Nom Voltage(Max)(ns)=22, Voltage(Nom)(V)=5, Bits(#)=6, Code_JEDEC=MS-001, DatasheetVersion=SDLS049B, Input Type=TTL, Output Drive (IOL/IOH)(Max)(mA)=-0.4/8, Output Type=CMOS, PackageReference=N0014A, Schmitt Trigger=Yes, Technology Family=LS, VCC(Max)(V)=5.25, VCC(Min)(V)=4.75
U5: library part 74HCT241, "High Speed CMOS Logic Non-Inverting Octal Buffer/Line Drivers with 3-State Outputs, N0020A, TUBE", F @ Nom Voltage(Max)(Mhz)=25, Generic Part Number=CD74HCT241, ICC @ Nom Voltage(Max)(mA)=0.08, Manufacturer="Texas Instruments", Operating Temperature Range(C)="-55 to 125", Rating=Catalog, tpd @ Nom Voltage(Max)(ns)=28, Voltage(Nom)(V)=5, Bits(#)=8, Code_JEDEC=MS-001, DatasheetVersion=SCHS167E, Input Type=TTL, Output Type=CMOS, PackageReference=N0020A, PackageVersion=http://www.ti.com/lit/ml/mpdi002c/mpdi002c.pdf, VCC(Max)(V)=5.5, VCC(Min)(V)=4.5
U7: library part LM358, "Dual Operational Amplifier, 3 to 32 V, 0 to 70 degC, 8-Pin PDIP (P), Pb-Free (RoHS), Tube", Case/Package=DIP, Manufacturer="Texas Instruments (TI)", Max Dual Supply Voltage=16V, Max Operating Temperature=70°C, Min Dual Supply Voltage=1.5V, Min Operating Temperature=0°C, Nominal Supply Current=1.2mA, Nominal Supply Voltage=5V, Nominal Voltage Gain=100dB, Output Current=30mA, Package Description="8-Pin Double In-line Package, Body 9.59 x 6.35 mm, Pitch 2.54 mm", Package Quantity=50, Package Reference=P0008A, Package Version="4040082/E, 04/2010", Channels=2, Common Mode Rejection Ratio=65dB, Datasheet URL=http://www.ti.com/lit/ds/symlink/lm358a.pdf, Datasheet Version="SLOS068T, 04/2015", Manufacturer URL=http://www.ti.com/, Max Supply Voltage=16V, Min Supply Voltage=1.5V, Mounting Technology=TH, Nominal Gain Bandwith Product=700KHz, Package URL=http://www.ti.com/lit/ml/mpdi001b/mpdi001b.pdf, Packaging=Rail/Tube, Pins=8, RoHS Compliant=True, Slew Rate=0.3V/us, Unity Gain Bandwidth Product=700KHz
U8 U9: library part TC4420, "6A High-Speed MOSFET Driver, Non-Inverting, Commercial Temperature", Code_JEDEC=MS-001-BA, DatasheetVersion="revC, Aug-2004", PackageDescription="8-Lead Plastic Dual In-Line (PA) - 300 mil Body [PDIP]", PackageReference=PDIP300-PA8, PackageVersion="revBB, Aug-2009"
VR2: library part "10K POT 3852A-282-103AL", "Diameter Panel Control, 10 KOhm, +/- 10%, 2 W, -1 to 125 degC, 3-Pin THD, RoHS, Bulk", Manufacturer=Bourns, Power (Watts)=2W, Resistance (Ohms)=10k, Resistive Material=Cermet, Standard Package=45, Temperature Coefficient=±150ppm/degC, Tolerance=±10%, Actuator Diameter="0.250\"(6.35mm)", Actuator Length="0.875\"(22.23mm)", Actuator Type=Slotted, Associated Product="36-8560-ND / -KNOBINSTRUMW/DIALRND.9\"DIA / 36-8555-ND / -KNOBINSTRUMSKIRTEDRND.7\"DIA / 36-8556-ND / -KNOBINSTRUMSKIRTEDRND.9\"DIA / 36-8565-ND / -KNOBINSTRUMDBLBARRND.7\"DIA / 36-8566-ND / -KNOBINSTRUMDBLBARRND.9\"DIA / 36-8568-ND / -KNOBINSTRUMSGLBARRND.7\"DIA / 36-8569-ND / -KNOBINSTRUMSGLBARRND.9\"DIA / 36-8559-ND / -KNOBINSTRUMW/DIALRND.7\"DIA / 226-1006-ND / -KNOBBLKGLOSS.75\"DIA.250\"SHAFT / 226-1007-ND / -KNOBBLKGLOSS.925\"DIA.250\"SHAFT / 226-1011-ND / -KNOBBLKGLOS", Built in Switch=None, Bushing Thread=3/8-32, Catalog Drawings="3852SeriesSide1 /  / 3852SeriesSide2", Category=Potentiometers,VariableResistors, Datasheet URL=https://datasheet.ciiva.com/11831/0900766b80f93b4b-11831016.pdf, Datasheet Version=Sep-14, Family=RotaryPotentiometers,Rheostats, Manufacturer URL=http://www.bourns.com/, Mounting Type=PanelMount, Number of Gangs=1, Number of Turns=1, Online Catalog=3852and3856Series, Other Names=3852A282103AL, Packaging=Bulk, PCN Design/Specification=PBTResinJun/2011, PCN Other=MultipleChanges01/Dec/2012, RoHS Information=3852A-LMaterialDeclaration, Rotation=280deg, Series=3852, Taper=Linear, Termination Style=SolderLug
VR3: library part "1K POT 3852A-282-102AL", "Diameter Panel Control, 1 KOhm, +/- 10%, 2 W, -1 to 125 degC, 3-Pin THD, RoHS, Bulk", Manufacturer=Bourns, Power (Watts)=2W, Resistance (Ohms)=10k, Resistive Material=Cermet, Standard Package=45, Temperature Coefficient=±150ppm/degC, Tolerance=±10%, Actuator Diameter="0.250\"(6.35mm)", Actuator Length="0.875\"(22.23mm)", Actuator Type=Slotted, Associated Product="36-8560-ND / -KNOBINSTRUMW/DIALRND.9\"DIA / 36-8555-ND / -KNOBINSTRUMSKIRTEDRND.7\"DIA / 36-8556-ND / -KNOBINSTRUMSKIRTEDRND.9\"DIA / 36-8565-ND / -KNOBINSTRUMDBLBARRND.7\"DIA / 36-8566-ND / -KNOBINSTRUMDBLBARRND.9\"DIA / 36-8568-ND / -KNOBINSTRUMSGLBARRND.7\"DIA / 36-8569-ND / -KNOBINSTRUMSGLBARRND.9\"DIA / 36-8559-ND / -KNOBINSTRUMW/DIALRND.7\"DIA / 226-1006-ND / -KNOBBLKGLOSS.75\"DIA.250\"SHAFT / 226-1007-ND / -KNOBBLKGLOSS.925\"DIA.250\"SHAFT / 226-1011-ND / -KNOBBLKGLOS", Built in Switch=None, Bushing Thread=3/8-32, Catalog Drawings="3852SeriesSide1 /  / 3852SeriesSide2", Category=Potentiometers,VariableResistors, Datasheet URL=https://datasheet.ciiva.com/11831/0900766b80f93b4b-11831016.pdf, Datasheet Version=Sep-14, Family=RotaryPotentiometers,Rheostats, Manufacturer URL=http://www.bourns.com/, Mounting Type=PanelMount, Number of Gangs=1, Number of Turns=1, Online Catalog=3852and3856Series, Other Names=3852A282103AL, Packaging=Bulk, PCN Design/Specification=PBTResinJun/2011, PCN Other=MultipleChanges01/Dec/2012, RoHS Information=3852A-LMaterialDeclaration, Rotation=280deg, Series=3852, Taper=Linear, Termination Style=SolderLug

## Via types
v1: diameter 0.6, hole 0.3, Top Layer to Bottom Layer, tented both sides, 32 vias

## Nets (pads, with @x,y where several pads share a name; then routed paths per layer and width w, separated by ;. In a path a pad name is that pad's centre, name@x,y a point inside that pad or via, vN(x,y) a via of type N, cw(c..) or ccw(c..) an arc to the next point about the centre after c; other vN are vias at no path point)
+5V: C1.2 C2.2 C3.2 C13.1 C14.1 D1.1 J4.3 R1.2 R2.2 U1.8 U2.4 U2.8 U3.2 U4.14 U5.20 VR1.1
+5V_Music: C15.2 C17.1 D4.1 Q1.3 R5.2 R14.1 R16.1 U6.2 U7.8
+15V: C4.2 C5.2 C16.2 C29.2 C30.2 C31.2 C33.2 C34.2 C35.2 D1.2 D4.2 D7.2 D9.2 J1.1 U3.3 U6.3 U8.1 U8.8 U9.1 U9.8
AuxIN: C23.1 J3.3 | length 9.9
  Top Layer w0.4: C23.1 85.725,17.825 85.725,14.375 87.1,13 J3.3
Clk_730K: U1.3 U4.1 | length 33
  Top Layer w0.4: U4.1 29,63.8 37.8,72.6 49.86,72.6 U1.3
Clk_invBuf: D5.2 R9.1 U4.2 U4.3 | length 19.4
  Top Layer w0.4: U4.3 U4.2 30.4,53 34.9,57.5 D5.2 R9.1
Drive1: J2.1 R17.1 U5.9 | length 4.4
  Top Layer w0.4: J2.1 47.7,30.3 49.2,28.8 51.067,28.8 U5.9
Drive1_NEW: J6.3 R18.2 U8.2 | length 17
  Top Layer w0.4: U8.2 36.935,20.075 36.935,22.835 R18.2 44.7,22.9 47.8,26 47.8,27.841 J6.3
Drive2: J2.2 U4.8 | length 15.6
  Top Layer w0.4: U4.8 36.62,38.08 38.8,35.9 42.7,35.9 45.16,33.44 J2.2
Drive2_NEW: J6.2 R19.2 U9.2 | length 43.8
  Top Layer w0.4: U9.2 12.822,30.058 12.822,32.803 R19.2 14.775,35 26.525,35 28.95,32.575 28.95,27.5 30.11,26.34 43.761,26.34 45.161,27.74 J6.2
GateCoil1: C28.2 D7.1 D8.2 J7.1 U8.6 U8.7
GateCoil2: C32.2 D9.1 D10.2 J7.3 U9.6 U9.7
GND: C1.1 C2.1 C3.1 C4.1 C5.1 C6.1 C7.1 C8.1 C9.1 C10.1 C11.1 C12.1 C13.2 C14.2 C15.1 C16.1 C17.2 C18.1 C19.1 C20.1 C22.1 C24.1 C25.1 C26.1 C27.1 C28.1 C29.1 C30.1 C31.1 C32.1 C33.1 C34.1 C35.1 D8.1 D10.1 J1.2 J1.3 J2.3 J3.1 J6.1 MH1.1 MH2.1 MH3.1 MH4.1 R4.1 R7.1 R11.1 R15.2 R17.2 R18.1 R19.1 R20.2 U1.1 U2.1 U4.7 U5.10 U7.4 U8.4 U8.5 U9.4 U9.5 VR3.2
  other v1: 90.625,9.225 65.55,10.675 83.15,12.2 89.5,24.9 49.625,25.1 93.9,26.2 19.65,37.6 83.15,37.6 95.85,37.6 42.002,38.122 28.427,38.247 39.577,39.947 9.325,41.125 39.627,42.872 83.225,43.6 39.477,45.822 96.15,48.9 9.175,49.3 89.5,50.3 19.65,63 32.35,63 70.45,63 51.85,65.05 38.925,68.475 31.825,68.6 74.95,71.65 93.5,74.525 31.35,75.5 38.7,75.7 48.025,77.5 19.65,88.4 57.75,88.4
NetC6_2: C6.2 U1.5 | length 5.4
  Top Layer w0.4: C6.2 57.62,66.12 U1.5
NetC7_2: C7.2 U2.5 | length 6.4
  Top Layer w0.4: C7.2 10.9,66 11.7,66.8 11.7,70.3 U2.5
NetC8_2: C8.2 C9.2 C10.2 D3.2 U2.2 U2.6 VR2.2 VR2.3 | length 53.4
  Top Layer w0.4: U2.2 5.84,75.46 ; VR2.3@11.4,91 VR2.2@17.55,91 ; VR2.3 11.4,90.85 11.4,88.5 5.3,82.4 5.3,80.6 6.5,79.4 6.5,76.12 5.84,75.46 ; D3.2 26.6,76.9 26.6,73.08 26,72.48 C10.2 C9.2 C8.2 14.95,72.25 14.28,72.92 U2.6 8.38,72.92 5.84,75.46
NetC11_2: C11.2 C12.2 D2.2 U1.2 U1.6 VR1.5 VR1.6 | length 52.1
  Top Layer w0.4: VR1.5 VR1.6 47.5,85.1 45.3,82.9 45.3,76.6 46.9,75 U1.2 53.1,75 55.64,72.46 U1.6 66.31,72.46 66.77,72 C12.2 69.1,72 69.7,72.6 69.7,74.997 70.5,75.797 D2.2
NetC18_2: C18.2 C19.2 C20.2 D5.1 R9.2 U4.11 | length 16.3
  Top Layer w0.4: U4.11 40.163,47.92 40.743,48.5 D5.1 R9.2 44.182,48.318 44.182,47.543 44.5,47.225 C18.2 C19.2 C20.2
NetC21_1: C21.1 R8.2 U7.1 | length 28.9
  Top Layer w0.4: R8.2 70.19,31.69 U7.1 66.21,34.19 64.675,35.725 64.675,43.975 66.7,46 C21.1
NetC21_2: C21.2 R11.2 U7.6 | length 9.5
  Top Layer w0.4: R11.2 74.5,50.743 75.25,49.993 C21.2 75.26,45.99 75.26,41.82 U7.6
NetC22_2: C22.2 R10.1 | length 4
  Top Layer w0.4: C22.2 72.4,17.9 72.4,20.1 R10.1
NetC23_2: C23.2 R13.2 U7.3 | length 19
  Top Layer w0.4: U7.3 75.27,30.487 R13.2@76,29.757 ; R13.2@76.182,29.682 R13.2 76,27.6 82.85,20.75 C23.2
NetC24_2: C24.2 C25.2 C26.2 D6.1 R12.2 U4.5 | length 17.3
  Top Layer w0.4: C24.2 C25.2 22.125,42.125 22.125,44.875 C26.2 22.25,45.23 21.5,45.98 R12.2 D6.1 24.675,47.325 25.775,47.325 27.72,45.38 U4.5
NetC27_2: C27.2 R13.1 R15.1 R16.2 | length 16.4
  Top Layer w0.4: C27.2 72.1,13.4 74.2,13.4 76,15.2 R15.1 ; R13.1 R15.1 ; R16.2 79.9,18.7 78.7,17.5 R15.1
NetD2_1: D2.1 U1.7 VR1.2 VR1.3 VR1.4 | length 31.5
  Top Layer w0.4: VR1.3 VR1.2 59.9,89.4 62.3,87 64.35,87 VR1.4 66.25,80.75 D2.1 60.5,75 U1.7
NetD3_1: D3.1 R1.1 U2.7 VR2.1 | length 23.2
  Top Layer w0.4: U2.7 15.96,75.46 D3.1 R1.1 17.6,81.1 17.6,83 23.9,89.3 VR2.1@23.9,91
NetD6_2: D6.2 R12.1 U4.4 | length 14.4
  Top Layer w0.4: R12.1 D6.2 24.5,50.8 27.38,47.92 U4.4
NetQ1_2: Q1.2 U7.7 | length 14.6
  Bottom Layer w0.4: U7.7 77.74,36.8 81.1,36.8 83,34.9 Q1.2
NetR2_1: R2.1 R4.2 U3.1 | length 16.1
  Top Layer w0.4: U3.1 73.66,85.817 73.2,85.357 R4.2 73.2,79.6 R2.1
NetR3_2: R3.2 U1.4 | length 4
  Top Layer w0.4: R3.2 48.88,68.8 U1.4
NetR5_1: R5.1 R7.2 U6.1 | length 16.5
  Top Layer w0.4: R5.1 80.4,61 84.3,64.9 87.4,64.9 R7.2 92.08,65 U6.1
NetR6_1: R6.1 U5.19 | length 14.7
  Top Layer w0.4: U5.19 60.8,48.693 60.8,57.1 59.5,58.4 R6.1
NetR8_1: R8.1 R10.2 U7.2 | length 15.6
  Top Layer w0.4: R8.1 68.3,20.8 68.3,23.6 72,27.3 R10.2 72,29.757 72.73,30.487 U7.2
NetR14_2: R14.2 U7.5 VR3.3 | length 18.4
  Top Layer w0.4: R14.2 77.81,44.31 U7.5 88.46,41.81 VR3.3
NetU4_6: U4.6 U4.9 | length 7.6
  Top Layer w0.4: U4.6 U4.9
NetU4_10: U4.10 U4.13 | length 11.7
  Top Layer w0.4: U4.10 34.92,45.38 34.1,46.2 34.1,52.1 35,53 U4.13
NetU4_12: U4.12 U5.11 | length 47.2
  Top Layer w0.4: U4.12 36.73,50.57 37.97,50.57 39.9,52.5 53.1,52.5 55.2,50.4 55.2,28.1 57.3,26 57.729,26 57.902,26.173 58.6,26.173 U5.11
Trig: J4.2 R3.1 R6.2 | length 43.2
  Top Layer w0.4: R3.1 46.7,60 R6.2
  Bottom Layer w0.4: J4.2 34.7,92.8 42.6,84.9 42.6,61.9 44.6,59.9 46.4,59.9 R3.1
Trig_fixed: J5.1 U2.3 | length 63.3
  Top Layer w0.4: U2.3 2.3,74.62 2.3,83.9 8.6,90.2 8.6,91.7 13.1,96.2 25.8,96.2 27.1,97.5 41.5,97.5 43.66,95.34 J5.1
Trig_fixed_sel: J4.1 J5.2 | length 13.1
  Top Layer w0.4: J4.1 39.368,95.34 41.908,92.8 J5.2
Trig_Music: J5.3 Q1.1 R20.1 | length 122.6
  Top Layer w0.4: Q1.1 87.375,33.4 R20.1
  Bottom Layer w0.4: J5.3 46.7,90.26 47.84,91.4 49.9,91.4 56.9,98.4 83.3,98.4 90.5,91.2 92.3,91.2 97.6,85.9 97.6,73 94.6,70 94.6,58 92.4,55.8 89.4,55.8 88,54.4 88,40.2 84.4,36.6 84.4,33.53 Q1.1
pads on no net: J3. J3.2 J7.2 U5.1 U5.2 U5.3 U5.4 U5.5 U5.6 U5.7 U5.8 U5.12 U5.13 U5.14 U5.15 U5.16 U5.17 U5.18 U8.3 U9.3 VR3.1

## Polygon pours and split planes (outlines as drawn)
+5V on Top Layer "+5V_L01_P020" (solid, pour order 20): 36.7,90.2 43.4,90.2 44.5,89.1 48,89.1 48.5,89.6 48.5,94.1 51.1,96.7 63,96.7 63,94.3 61.2,92.5 52.6,92.5 52.3,92.2 52.3,86.1 32.5,86.1 36.7,87.5
GateCoil2 on Top Layer "GATECOIL2_L01_P034" (solid, pour order 34): 9.275,23.475 9.275,18.775 8.7,18.2 3.2,18.2 2.7,17.7 2.6,17.7 2.6,16.475 3.225,15.85 7.675,15.85 8.75,14.775 8.75,12.85 9.275,12.325 15.15,6.45 15.15,2.9 15.2,2.9 15.45,2.65 17.675,2.65 18.025,3 18.075,3 18.075,7.2 14.45,10.825 12.125,13.15 11.075,13.15 10.875,13.35 10.825,13.35 10.825,17.7 11.475,18.35 13.65,18.35 14.175,18.875 14.175,23.175 13.775,23.575 9.45,23.575 9.25,23.375
GateCoil1 on Top Layer "GATECOIL1_L01_P033" (solid, pour order 33): 35.25,7.887 36.113,8.75 38.025,8.75 38.025,13.15 37.6,13.575 37.55,13.525 33.475,13.525 33.475,13.4 33.1,13.025 33.1,9.175 32.675,8.75 26.325,8.75 23.95,6.375 21.525,6.375 20.9,5.75 20.9,2.6 21.375,2.125 34.725,2.125 35.25,2.65
+5V_Music on Top Layer "+5V_MUSIC_L01_P027" (solid, pour order 27): 69.2,43 67.1,40.9 65.6,40.9 65.3,40.6 65.3,38.5 65.7,38.1 77.9,38.1 79.3,36.7 79.3,32.8 78.2,31.7 78.2,28.5 79,27.7 81.2,27.7 82.1,28.6 82.1,37.3 79.4,40 72.3,40 71.4,40.9 71.4,42.8 71.2,43
+5V_Music on Top Layer "+5V_MUSIC_L01_P026" (solid, pour order 26): 95.7,65.8 95.7,63.8 94.8,62.9 86.7,62.9 84.4,60.6 84.4,57.2 83.3,56.1 77.6,56.1 77.6,52.5 78.4,51.7 81.8,51.7 85.1,55 89.3,55 89.7,55.4 89.7,59.7 90.5,60.5 96.8,60.5 97.7,61.4 97.7,66.9 96.8,66.9 96.3,66.4
+5V on Top Layer "+5V_L01_P022" (solid, pour order 22): 35.3,62.1 35.3,60 35.7,59.6 43.4,59.6 45.4,61.6 52.2,61.6 53.2,60.6 53.2,56.7 54.3,55.6 57.6,55.6 57.7,55.7 57.7,61.5 56.1,63.1 36.4,63.1 35.4,62.1
+5V on Top Layer "+5V_L01_P021" (solid, pour order 21): 36.3,54.9 36.6,54.6 52.2,54.6 52.8,55.2 58.5,55.2 57.7,56 38.5,56 37.9,56.6 36,56.6 34.9,55.5 35.8,54.6 36.8,54.6
+5V on Top Layer "+5V_L01_P018" (solid, pour order 18): 32.3,91.5 23.392,82.592 23.72,80.08 25.3,78.5 29.1,78.5 36.7,86.1 36.7,90.2 35.4,91.5
+5V on Top Layer "+5V_L01_P017" (solid, pour order 17): 55.1,55.9 54.9,55.7 54.9,53.3 56.9,51.3 56.9,49.2 58,48.1 59.3,48.1 60.1,48.9 60.1,50.7 58.5,52.3 58.5,55.2 57.8,55.9 55,55.9
+15V on Top Layer "+15V_L01_P016" (solid, pour order 16): 79.7,98.1 78.2,96.6 78.2,88.5 79.2,87.5 81,87.5 81.5,87 81.5,85.1 83,83.6 83.55,83.05 86.4,80.4 98.4,80.4 99,81 99,89.3 97.1,91.2 89.8,91.2 87.9,93.1 87.9,96.9 86.7,98.1 79.8,98.1
+5V on Top Layer "+5V_L01_P014" (solid, pour order 14): 65.2,98.4 63,96.7 63,88.2 70.7,88.2 71.8,89.3 71.8,91.8 72.2,92.2 74.8,92.2 75.1,91.9 75.1,79.3 76.5,77.9 81.3,77.9 81.4,78 81.4,79.6 80.8,80.2 79.5,80.2 77.5,82.2 77.5,92.3 75.5,94.3 74.5,94.3 73.6,95.2 73.6,97.6 72.8,98.4
+15V on Top Layer "+15V_L01_P007" (solid, pour order 7): 97.3,60.1 98.1,60.9 98.1,81.6 98.4,81.9 99,81.9 99,55.9 98.7,55.6 97.3,57
+15V on Top Layer "+15V_L01_P005" (solid, pour order 5): 91,60.1 91.1,60 91.1,53.7 91.7,53.1 93.2,53.1 93.6,53.5 93.6,55.6 93.9,55.9 95.7,55.9 96.4,55.2 98.3,55.2 98.7,55.6 98.7,58.7 97.3,60.1 91.2,60.1
+5V on Bottom Layer "+5V_L04_P023" (solid, pour order 23): 64,93.7 61.8,91.5 61.7,91.5 61.7,90.2 52.6,81.1 52.6,51.9 53.5,51 57.9,51 57.9,51.2 60.8,54.1 60.8,72.7 69,80.9 69,92.2 67.5,93.7 64.1,93.7
+15V on Bottom Layer "+15V_L04_P032" (solid, pour order 32): 27.85,27.9 24.05,31.7 7.6,31.7 3.6,27.7 3.6,12.225 3.5,12.125 5.95,9.675 11.225,9.675 14.45,6.45 22.425,6.45 25.475,3.4 50.3,3.4 50.3,9.5 67.4,26.6 67.4,47.2 80.2,60 88.3,60 90.7,62.4 90.7,84.2 87.7,87.2 85.9,87.2 83.2,84.5 83.2,73.2 76.2,66.2 63.3,53.3 62.8,52.8 54.2,44.8 54.2,31.7 50.4,27.9
+5V_Music on Bottom Layer "+5V_MUSIC_L04_P028" (solid, pour order 28): 77.9,55.9 77.9,52 72.8,46.9 71.3,46.9 68.9,44.5 68.9,40.2 69.5,39.6 70.4,39.6 71.4,40.6 71.4,43.2 71.9,43.7 75.5,43.7 76.9,45.1 76.9,48.1 80.9,52.1 80.8,52.2 80.8,56 78,56
+5V on Bottom Layer "+5V_L04_P024" (solid, pour order 24): 3.3,86.9 1.8,85.4 1.8,66.1 3.4,64.5 26.3,64.5 28.9,67.1 28.9,84.1 28.9,84.4 27.1,86.7 3.3,86.7
GND on GND_1 "GND" (solid, pour order 0): 1,99 99,99 99,1 1,1
GND on GND_2 "GND" (solid, pour order 1): 1,99 99,99 99,1 1,1

## Silkscreen, mask and mechanical layers (free items; w line width, h text height)
Top Overlay:
  lines w0.1: 31.3,93.1 31.3,93.2
  lines w0.508: 32.1,94.025 31.3,93.225 ; 32.25,92.275 31.3,93.225 ; 33,93.225 31.3,93.225 ; 44.05,93.9 43.25,93.1 ; 44.2,92.15 43.25,93.1 ; 44.95,93.1 43.25,93.1
  text "Interrupt" at 26.175,95.067 h2.03
  text "Fixed" at 36.8,95 h2.03
  text "Music" at 36.9,89.307 h2.03
  text "No Interrupt" at 26.227,88.65 h2.03
  text "Duty Cycle %" at 12.111,85.361 h2.03
  text "Fixed Interrupter" at 27.536,81.307 h2.03
  text "Main Clock" at 40.95,81.26 h2.03
  text "Frequency" at 60.7,79.656 h2.03
  text "Gate Pulse Generation" at 4.069,55.317 h2.03
  text "Music Interrupter" at 64.725,55.327 h2.03
  text "V Ref." at 87.1,46.456 h2.03
  text "GND" at 43.425,31.875 h2.03 r90
  text "Drive1" at 48.55,31.855 h2.03 r90
  text "Drive2" at 45.9,31.8 h2.03 r90
  text "Solid State" at 43.583,12.5 h5.08
  text "Tesla Coil" at 43.575,9.16 h5.08
  text "Driver" at 43.568,5.57 h5.08
  text "NC" at 18.4,5.542 h1.27
  text "By:" at 54.431,4.902 h2.54
  text "Coil2" at 9.912,3.334 h2.03
  text "Coil1" at 23.575,3.296 h2.03
  text "Naman Tanwar" at 61,0.843 h3.81
Bottom Overlay:
  text "Frequency (KHz)" at 66.244,95.194 h2.54
  text "Interrupter Duty Cycle %" at 24.3,94.245 h2.54
  text "Solid State Tesla Coil Driver" at 51.308,82.902 h4.57
  text "Voltage Reference for PWM" at 98.2,46.601 h2.54
  text "By:" at 88.733,5.701 h3.81
  text "NAMAN TANWAR" at 88.566,1.801 h3.81
Board Shape:
  the board outline again, w0.254

## Text inside footprints (layer, text, board x,y; h text height)
J3: Mechanical 13 "PCB edge" at 101.225,22.2 h1.02 r270